# Altium PCB Alsoran PCB-20180114-version2.PcbDoc (part 3 of 4)
Units mil, origin at the board's own origin, x right, y up, seen from the top; angles counter-clockwise.
Board outline 15223.67 x 4104.31 mil, 2 copper layers (Top Layer, Bottom Layer); 293 components, 222 nets, 1561 pads, 240 vias.
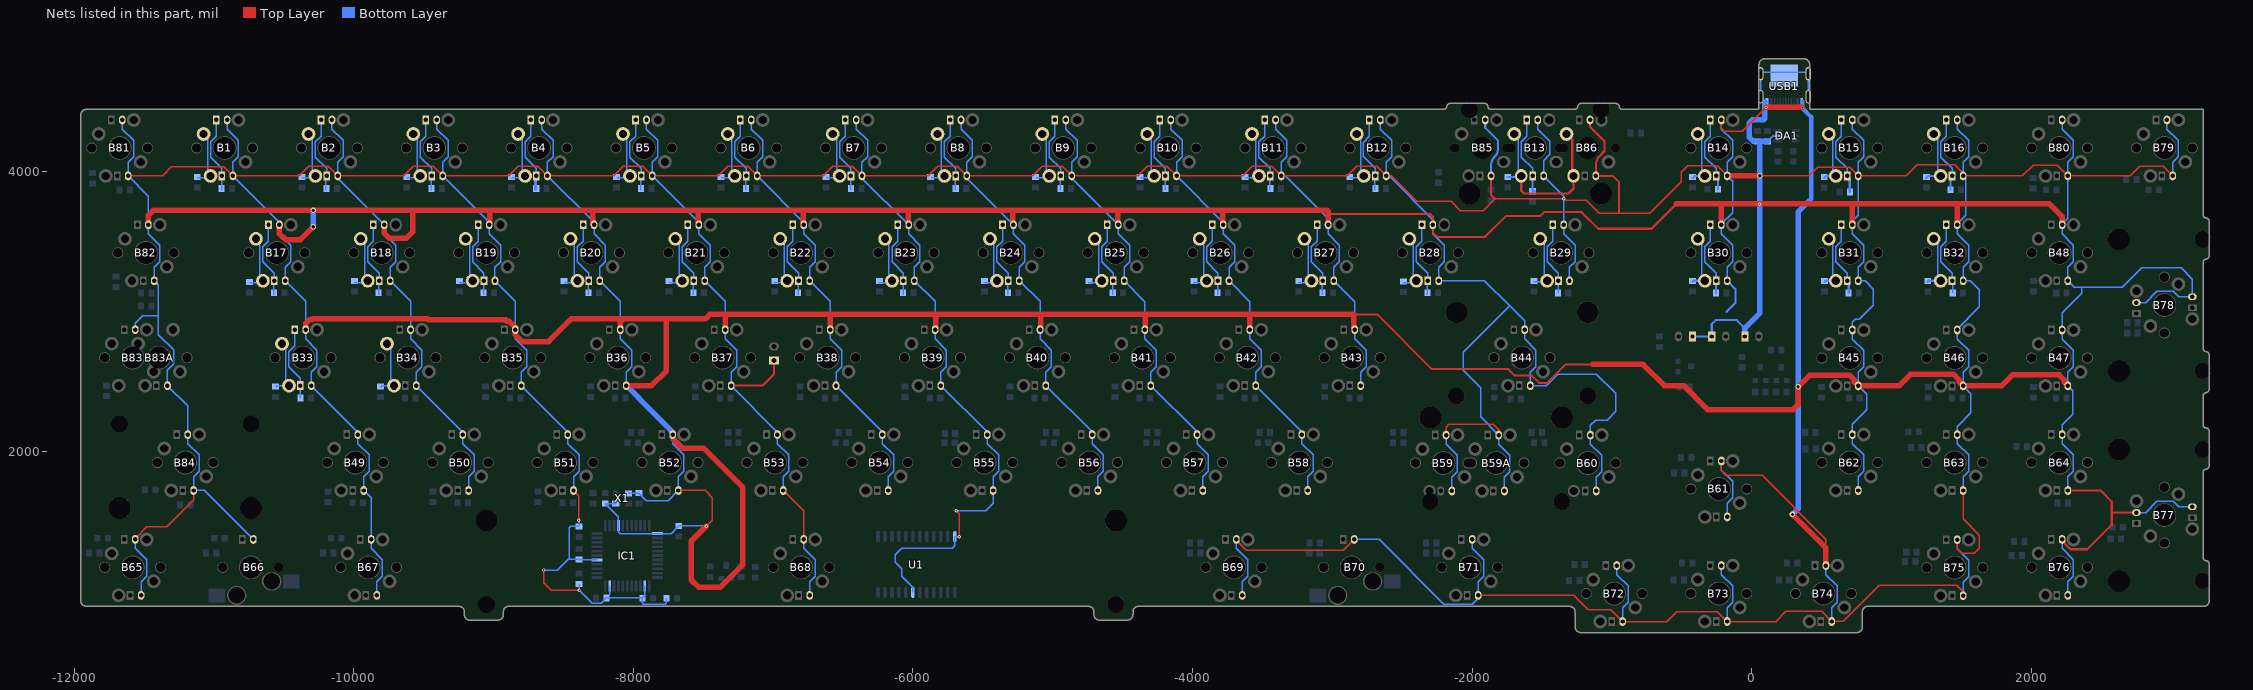
[diagram p3: the nets of this part, all layers, seen from the top]

## Via types
v1: diameter 23.62, hole 11.81, Top Layer to Bottom Layer, 150 vias
v2: diameter 27.56, hole 19.68, Top Layer to Bottom Layer, 63 vias
v3: diameter 39.37, hole 23.62, Top Layer to Bottom Layer, 12 vias
v4: diameter 24.41, hole 11.81, Top Layer to Bottom Layer, tented both sides, 10 vias
v5: diameter 23.62, hole 11.81, Top Layer to Bottom Layer, tented both sides, 3 vias
v6: diameter 31.5, hole 19.68, Top Layer to Bottom Layer, 2 vias

## Nets (pads, with @x,y where several pads share a name; then routed paths per layer and width w, separated by ;. In a path a pad name is that pad's centre, name@x,y a point inside that pad or via, vN(x,y) a via of type N, cw(c..) or ccw(c..) an arc to the next point about the centre after c; other vN are vias at no path point) (continued)
LROW: B1.4 B2.4 B3.4 B4.4 B5.4 B6.4 B7.4 B8.4 B9.4 B10.4 B11.4 B12.4 B13.4 B14.4 B15.4 B16.4 B17.4 B18.4 B19.4 B20.4 B21.4 B22.4 B23.4 B24.4 B25.4 B26.4 B27.4 B28.4 B29.4 B30.4 B31.4 B32.4 B33.4 B34.4 B35.4 B36.4 B37.4 B38.4 B39.4 B40.4 B41.4 B42.4 B43.4 B44.4 B45.4 B46.4 B47.4 B48.4 B49.4 B50.4 B51.4 B52.4 B53.4 B54.4 B55.4 B56.4 B57.4 B58.4 B59.4 B59A.4 B60.4 B61.4 B62.4 B63.4 B64.4 B65.4 B66.4 B67.4 B68.4 B69.4 B70.4 B71.4 B72.4 B73.4 B74.4 B75.4 B76.4 B77.4 B78.4 B79.4 B80.4 B81.4 B82.4 B83.4 B83A.4 B84.4 B85.4 B86.4 C1.1 C2.1 C3.1 C4.1 C5.1 C6.1 C7.1 C8.1 CapsLED1.2 DA1.2 IC1.5 IC1.15 IC1.23 IC1.35 IC1.43 NumLED1.2 pad.4@232.28,4688.98 R95.1 RA1.1 RA2.1 S1.1 ScorllLED1.2 U1.12 U1.19 USB1.0 USB1.A1 USB1.A12 USB1.B1 USB1.B12 X1.2 X1.4 | length 138991.8
  Top Layer w10: B81.4@-11613.23,3969.29 -11367.32,3969.29 -11303.15,4033.46 -10927.57,4033.46 B1.4@-10863.39,3969.29 -10390.94,3969.29 -10322.74,4037.5 -10181.77,4037.5 B2.4@-10113.56,3969.29 -9641.11,3969.29 -9572.9,4037.5 -9431.93,4037.5 B3.4@-9363.72,3969.29 -8891.27,3969.29 -8823.06,4037.5 -8682.09,4037.5 B4.4@-8613.89,3969.29 -8141.44,3969.29 -8073.23,4037.5 -7932.26,4037.5 B5.4@-7864.05,3969.29 -7391.6,3969.29 -7323.39,4037.5 -7182.42,4037.5 B6.4@-7114.21,3969.29 -6641.77,3969.29 -6573.56,4037.5 -6432.59,4037.5 B7.4@-6364.38,3969.29 -5891.93,3969.29 -5823.72,4037.5 -5682.75,4037.5 B8.4@-5614.54,3969.29 -5142.09,3969.29 -5073.88,4037.5 -4932.92,4037.5 B9.4@-4864.71,3969.29 -4392.26,3969.29 -4324.05,4037.5 -4183.08,4037.5 B10.4@-4114.87,3969.29 -3642.42,3969.29 -3574.21,4037.5 -3433.24,4037.5 B11.4@-3365.03,3969.29 -2892.59,3969.29 -2824.38,4037.5 -2683.41,4037.5 B12.4@-2615.2,3969.29 -2579.79,3969.29 -2397.5,3787 -2151.31,3787 -2084.15,3719.85 -1922.15,3719.85 -1837,3805 v4(-1345.82,3805) -1334.69,3793.87 -1183.67,3793.87 -1092.47,3702.67 -728.48,3702.67 -504.8,3926.35 -504.8,3995.24 -458.7,4041.34 -248.27,4041.34 B14.4@-176.22,3969.29 ; B65.4@-11562.36,1369.29 -11562.36,1375.43 -11479.12,1458.66 -11338.27,1458.66 -11144.72,1652.21 B84.4@-11144.72,1719.29 ; v1(-8640.2,1150.1) -8640.2,1058.8 -8587.8,1006.4 v1(-8387.8,1006.4) ; B51.4@-8427.75,1719.29 -8389.76,1681.3 v1(-8389.76,1505.91) ; B36.4@-8092.67,2869.29 B36.4@-8092.67,2875.43 ; B52.4@-7677.53,1719.29 -7487.01,1719.29 -7435.04,1667.32 -7435.04,1507.87 v1(-7478.35,1464.57) ; B53.4@-6927.31,1719.29 -6780.86,1572.84 B68.4@-6780.86,1369.29 ; v1(-5690.94,1574.8) -5668.31,1552.17 v1(-5668.31,1388.78) ; B69.4@-3686.37,1369.29 -3686.37,1363.15 -3614.56,1291.34 -2921.22,1291.34 B70.4@-2843.27,1369.29 ; B59.4@-2187.06,2115.8 -2187.06,2171.21 -2166.88,2191.39 -1848.87,2191.39 -1810.97,2153.49 B59A.4@-1810.97,2115.8 ; B71.4@-1957.72,969.29 -1274.41,969.29 -1171.26,866.14 -1008.11,866.14 B72.4@-924.25,782.28 -607.48,782.28 -537.4,852.36 -246.3,852.36 B73.4@-176.22,782.28 170.08,782.28 242.13,854.33 499.76,854.33 B74.4@571.81,782.28 574.96,785.43 655.51,785.43 911.42,1041.34 1464.57,1041.34 1510.79,995.12 B75.4@1510.79,967.32 ; B61.4@-217.87,1930.31 -217.87,1865.51 -179.13,1826.77 72.83,1826.77 530.16,1369.44 530.16,1308.42 ; B14.4@-217.87,4369.29 -217.87,4308.42 -198.82,4289.37 -66.93,4289.37 v1(102.36,4458.66) ; v3@55.51,3969.29 410.24,3969.29 472.44,4031.5 698.58,4031.5 B15.4@760.79,3969.29 1105.12,3969.29 1183.19,4047.36 1452.22,4047.36 1510.79,3988.8 B16.4@1510.79,3969.29 1933.86,3969.29 2011.81,4047.24 2182.83,4047.24 B80.4@2260.79,3969.29 2706.69,3969.29 2774.8,4037.4 2942.68,4037.4 B79.4@3010.79,3969.29 ; B75.4@1469.14,1367.32 1469.14,1302.51 1501.97,1269.69 1592.52,1269.69 1627.95,1305.12 1627.95,1399.61 1510.79,1516.77 B63.4@1510.79,1719.29
  Top Layer w14: -2848.56,2978.35 -2678.58,2978.35 -2288.33,2588.1 -1741.6,2588.1 -1694.1,2540.6 -1573.2,2540.6 -1521.7,2489.1 -1463.21,2489.1 -1330.41,2621.9 -1139.62,2621.9
  Top Layer w15: -3031.02,3715.04 -3013.68,3697.7 -2301.5,3697.7 -2281.04,3677.24 B28.4@-2281.04,3619.29 -2281.04,3563.54 -2250.5,3533 -1908.39,3533 -1757.77,3683.63 -1512.39,3683.63 -1485.89,3710.13 -1218.36,3710.13 -1099.31,3591.08 -717.92,3591.08 -539.13,3769.87 ; B85.4@-1865.36,3969.29 -1865.36,3833.36 -1837,3805 ; B86.4@-1157.17,4369.29 -1157.17,4321.26 -1053.5,4217.58 -1053.5,4147.5 -1086.24,4114.76 ccw(c-1015.53,4044.05) -1115.53,4044.05 B86.4@-1115.53,3969.29 -995.29,3969.29 -949,3923 -949,3708
  Top Layer w15.75: B37.4@-7300.63,2469.29 -7075.98,2469.29 -6994.09,2551.18 S1.1@-6994.09,2649.61 ; B76.4@2219.14,1369.29 2235.84,1352.59 2235.84,1342.39 2279.02,1299.21 2399.61,1299.21 2574.8,1474.41 2574.8,1561.66 ; B64.4@2260.79,1719.29 2495.28,1719.29 2574.8,1639.76 2574.8,1561.66 ; B77.4@2750.79,1561.66 2574.8,1561.66
  Top Layer w39.37: B82.4@-11467.87,3619.29 -11467.87,3687.64 -11433.07,3722.44 v3(-10289.37,3722.44) -9578.74,3722.44 ; B17.4@-10530.86,3619.29 -10530.86,3554.48 -10507.87,3531.5 ; -10502.74,3531.5 -10483.05,3511.81 -10382.87,3511.81 v3(-10289.37,3605.31) ; B33.4@-10343.85,2869.29 -10343.85,2914.02 -10318.9,2938.98 -10301.07,2938.98 -10294,2946.05 -10223.34,2946.05 -9543.61,2946.05 -9472.94,2946.05 -9465.87,2938.98 -8912.75,2938.98 -8902.12,2928.35 -8886.38,2928.35 -8843.06,2885.03 -8843.06,2832.68 -8794.84,2784.45 -8606.3,2784.45 -8444.7,2946.05 -7764.16,2946.05 ; B18.4@-9780.88,3619.29 -9780.88,3558.44 -9753.94,3531.5 ; -9743.89,3522.64 -9625,3522.64 -9578.74,3568.9 -9578.74,3722.44 ; B19.4@-9030.89,3619.29 -9028,3622.18 -9028,3722.44 ; B20.4@-8280.91,3619.29 -8288.79,3627.17 -8288.79,3722.44 ; B36.4@-8092.67,2875.43 -8092.67,2924.06 -8074.8,2941.93 ; B36.4@-8051.02,2469.29 -7870.28,2469.29 -7764.16,2575.41 -7764.16,2946.05 ; B52.4@-7719.18,2119.29 -7714.29,2114.4 -7714.29,2087.5 -7646.48,2019.69 -7494.99,2019.69 -7216.54,1741.23 -7216.54,1188.61 -7379.55,1025.59 -7530.51,1025.59 -7585.63,1080.71 -7585.63,1357.28 v1(-7478.35,1464.57) ; B21.4@-7535.8,3624.17 -7535.8,3722.44 ; B37.4@-7342.28,2869.29 -7342.28,2964.57 ; B22.4@-6785.76,3624.11 -6785.76,3722.44 ; B38.4@-6591.88,2869.29 -6591.88,2978.35 ; B23.4@-6032.77,3621.11 -6032.77,3722.44 ; B39.4@-5841.49,2869.29 -5836.6,2874.18 -5836.6,2976.68 -5834.93,2978.35 ; B24.4@-5286.68,3624.99 -5286.68,3722.44 ; B40.4@-5091.1,2869.29 -5086.21,2874.18 -5086.21,2975.06 -5082.93,2978.35 ; B25.4@-4535.65,3623.96 -4535.65,3722.44 ; B41.4@-4340.7,2869.29 -4339.78,2870.21 -4339.78,2978.35 ; B26.4@-3783.65,3621.93 -3783.65,3722.44 ; B42.4@-3590.31,2869.29 -3590.73,2869.71 -3590.73,2978.35 ; B27.4@-3031.02,3619.29 -3031.02,3715.04 -3038.43,3722.44 -3783.65,3722.44 ; B43.4@-2839.91,2869.29 -2848.56,2877.94 -2848.56,2978.35 -3590.73,2978.35 ; -1139.62,2621.9 -778.45,2621.9 -626.04,2469.49 -487.02,2469.49 -315.76,2298.23 -227.36,2298.23 295.8,2298.23 330.71,2333.14 v3(330.71,2460.75) 415.23,2545.28 697.99,2545.28 733.03,2510.24 733.03,2495.08 B45.4@760.79,2467.32 1053.94,2467.32 1137.8,2551.18 1442.09,2551.18 1483.03,2510.24 1483.03,2495.08 B46.4@1510.79,2467.32 1786.22,2467.32 1864.7,2545.8 2197.47,2545.8 2233.03,2510.24 2233.03,2495.08 B47.4@2260.79,2467.32 ; -539.13,3769.87 2127.77,3769.87 2219.14,3678.5 B48.4@2219.14,3619.29 ; B30.4@-217.87,3619.29 -217.87,3766.28 ; B14.4@-175.83,3969.68 v3(55.51,3969.68) ; v1(102.36,4458.66) v1@362.19,4458.66 ; v3(290.35,1548.23) 530.16,1308.42 B74.4@530.16,1182.28 ; B31.4@719.14,3619.29 719.14,3757.42 ; B32.4@1469.14,3619.29 1469.14,3761.65 ; -9578.74,3722.44 -9028,3722.44 ; -9028,3722.44 -8288.79,3722.44 ; -8288.79,3722.44 -7535.8,3722.44 ; -7764.16,2946.05 -7485.05,2946.05 -7452.76,2978.35 -6591.88,2978.35 ; -7535.8,3722.44 -6785.76,3722.44 ; -6785.76,3722.44 -6032.77,3722.44 ; -6591.88,2978.35 -5834.93,2978.35 ; -6032.77,3722.44 -5286.68,3722.44 ; -5834.93,2978.35 -5082.93,2978.35 ; -5286.68,3722.44 -4535.65,3722.44 ; -5082.93,2978.35 -4339.78,2978.35 ; -4535.65,3722.44 -3783.65,3722.44 ; -4339.78,2978.35 -3590.73,2978.35
  Bottom Layer w10: B81.4@-11654.88,4369.29 -11654.88,4304.48 -11573.68,4223.29 -11573.68,4106.62 -11613.23,4067.08 B81.4@-11613.23,3969.29 -11467.87,3823.93 B82.4@-11467.87,3619.29 -11467.87,3554.48 -11386.68,3473.29 -11386.68,3355.45 -11426.22,3315.91 B82.4@-11426.22,3219.29 -11397.64,3190.71 -11397.64,2964.57 ; B65.4@-11562.36,1369.29 -11562.36,1304.48 -11481.16,1223.29 -11481.16,1105.45 -11520.71,1065.91 B65.4@-11520.71,969.29 ; B83.4@-11562.36,2869.29 -11562.36,2915.99 -11507.87,2970.47 -11403.54,2970.47 -11397.64,2964.57 ; B1.4@-10905.04,4369.29 -10905.04,4304.48 -10823.85,4223.29 -10823.85,4105.45 -10863.39,4065.91 B1.4@-10863.39,3969.29 -10530.86,3636.76 B17.4@-10530.86,3619.29 -10530.86,3554.48 -10449.67,3473.29 -10449.67,3355.45 -10489.21,3315.91 B17.4@-10489.21,3219.29 -10343.85,3073.93 B33.4@-10343.85,2869.29 -10343.85,2804.48 -10262.66,2723.29 -10262.66,2605.45 -10302.2,2565.91 B33.4@-10302.2,2469.29 -9969.84,2136.92 B49.4@-9969.84,2119.29 -9969.84,2054.48 -9888.64,1973.29 -9888.64,1856.62 -9928.19,1817.08 B49.4@-9928.19,1719.29 -9875.35,1666.45 B67.4@-9875.35,1369.29 -9875.35,1304.48 -9794.16,1223.29 -9794.16,1106.62 -9833.7,1067.08 B67.4@-9833.7,969.29 ; B66.4@-10717.28,1369.29 -11067.28,1719.29 B84.4@-11144.72,1719.29 -11144.72,1815.91 -11105.18,1855.45 -11105.18,1973.29 -11186.37,2054.48 B84.4@-11186.37,2119.29 -11186.37,2323.93 B83A.4@-11331.73,2469.29 -11331.73,2579.68 -11287.4,2624.02 -11287.4,2724.41 -11397.64,2834.65 -11397.64,2964.57 ; B2.4@-10155.2,4369.29 -10155.2,4304.48 -10074.01,4223.29 -10074.01,4105.45 -10113.56,4065.91 B2.4@-10113.56,3969.29 -10113.56,3951.97 B18.4@-9780.88,3619.29 -9780.88,3554.48 -9699.68,3473.29 -9699.68,3355.45 -9739.23,3315.91 B18.4@-9739.23,3219.29 -9593.46,3073.52 B34.4@-9593.46,2869.29 -9593.46,2804.48 -9512.27,2723.29 -9512.27,2605.45 -9551.81,2565.91 B34.4@-9551.81,2469.29 -9219.62,2137.1 B50.4@-9219.62,2119.29 -9219.62,2054.48 -9138.43,1973.29 -9138.43,1856.62 -9177.97,1817.08 B50.4@-9177.97,1719.29 ; B3.4@-9405.37,4369.29 -9405.37,4304.48 -9324.18,4223.29 -9324.18,4105.45 -9363.72,4065.91 B3.4@-9363.72,3969.29 -9030.89,3636.46 B19.4@-9030.89,3619.29 -9030.89,3554.48 -8949.7,3473.29 -8949.7,3356.62 -8989.25,3317.08 B19.4@-8989.25,3219.29 -8843.06,3073.11 B35.4@-8843.06,2869.29 -8843.06,2804.48 -8761.87,2723.29 -8761.87,2605.45 -8801.42,2565.91 B35.4@-8801.42,2469.29 -8469.4,2137.27 B51.4@-8469.4,2119.29 -8469.4,2054.48 -8388.21,1973.29 -8388.21,1856.62 -8427.75,1817.08 B51.4@-8427.75,1719.29 ; B4.4@-8655.53,4369.29 -8655.53,4304.48 -8574.34,4223.29 -8574.34,4105.45 -8613.89,4065.91 B4.4@-8613.89,3969.29 -8280.91,3636.31 B20.4@-8280.91,3619.29 -8280.91,3554.48 -8199.72,3473.29 -8199.72,3356.62 -8239.26,3317.08 B20.4@-8239.26,3219.29 -8092.67,3072.7 B36.4@-8092.67,2869.29 -8092.67,2804.48 -8011.48,2723.29 -8011.48,2605.45 -8051.02,2565.91 B36.4@-8051.02,2469.29 ; v1(-8640.2,1150.1) -8542.9,1150.1 -8466.23,1226.77 -8456.4,1226.77 ; v1(-8389.76,1505.91) -8387.8,1503.94 C8.1@-8387.8,1462.6 -8446.85,1462.6 -8456.4,1453.05 -8456.4,1226.77 ; C2.1@-8387.8,1049.21 v1(-8387.8,1006.4) -8294.7,913.31 -8230.39,913.31 C4.1@-8192.91,950.79 -7937.01,950.79 -7937.01,916.11 -7928.2,907.3 -7769.8,907.3 -7763.78,913.32 R95.1@-7763.78,948.82 ; IC1.5@-8259.84,1222.44 -8383.46,1222.44 C1.1@-8387.8,1226.77 -8456.4,1226.77 ; -8169.29,974.41 IC1.43@-8169.29,1037.4 ; X1.4@-8125.98,1627.59 -8127.56,1626.01 C6.1@-8200.79,1626.01 -8106.3,1531.52 IC1.15@-8106.3,1470.47 -8106.3,1425.2 -8092.52,1411.42 IC1.23@-7826.77,1411.42 -7730.31,1411.42 C3.1@-7675.2,1466.54 -7480.32,1466.54 v1(-7478.35,1464.57) ; X1.2@-8035.43,1698.45 -7962.2,1698.45 C7.1@-7960.63,1700.03 -7907.49,1646.89 -7749.94,1646.89 B52.4@-7677.53,1719.29 -7677.53,1817.08 -7637.99,1856.62 -7637.99,1973.29 -7719.18,2054.48 B52.4@-7719.18,2119.29 ; C5.1@-7935.04,948.82 -7917.32,966.54 IC1.35@-7917.32,1037.4 ; B5.4@-7905.7,4369.29 -7905.7,4304.48 -7824.5,4223.29 -7824.5,4105.45 -7864.05,4065.91 B5.4@-7864.05,3969.29 -7530.93,3636.17 B21.4@-7530.93,3619.29 -7530.93,3554.48 -7449.73,3473.29 -7449.73,3356.62 -7489.28,3317.08 B21.4@-7489.28,3219.29 -7342.28,3072.29 B37.4@-7342.28,2869.29 -7342.28,2804.48 -7261.08,2723.29 -7261.08,2605.45 -7300.63,2565.91 B37.4@-7300.63,2469.29 -6968.96,2137.62 B53.4@-6968.96,2119.29 -6968.96,2054.48 -6887.77,1973.29 -6887.77,1856.62 -6927.31,1817.08 B53.4@-6927.31,1719.29 ; B6.4@-7155.86,4369.29 -7155.86,4304.48 -7074.67,4223.29 -7074.67,4105.45 -7114.21,4065.91 B6.4@-7114.21,3969.29 -6780.94,3636.02 B22.4@-6780.94,3619.29 -6780.94,3554.48 -6699.75,3473.29 -6699.75,3356.62 -6739.29,3317.08 B22.4@-6739.29,3219.29 -6591.88,3071.88 B38.4@-6591.88,2869.29 -6591.88,2804.48 -6510.69,2723.29 -6510.69,2605.45 -6550.24,2565.91 B38.4@-6550.24,2469.29 -6218.74,2137.8 B54.4@-6218.74,2119.29 -6218.74,2054.48 -6137.55,1973.29 -6137.55,1856.62 -6177.1,1817.08 B54.4@-6177.1,1719.29 ; B68.4@-6780.86,1369.29 -6780.86,1304.48 -6699.67,1223.29 -6699.67,1105.45 -6739.21,1065.91 B68.4@-6739.21,969.29 ; B7.4@-6406.02,4369.29 -6406.02,4304.48 -6324.83,4223.29 -6324.83,4105.45 -6364.38,4065.91 B7.4@-6364.38,3969.29 -6364.38,3952.71 B23.4@-6030.96,3619.29 -6030.96,3554.48 -5949.77,3473.29 -5949.77,3355.45 -5989.31,3315.91 B23.4@-5989.31,3219.29 -5841.49,3071.47 B39.4@-5841.49,2869.29 -5841.49,2804.48 -5760.3,2723.29 -5760.3,2605.45 -5799.84,2565.91 B39.4@-5799.84,2469.29 -5468.52,2137.97 B55.4@-5468.52,2119.29 -5468.52,2054.48 -5387.33,1973.29 -5387.33,1856.62 -5426.88,1817.08 B55.4@-5426.88,1719.29 -5426.88,1626.27 -5478.35,1574.8 v1(-5690.94,1574.8) ; U1.19@-6000,989.76 -6000,1025.59 -6081.69,1107.28 -6081.69,1159.45 -6127.95,1205.71 -6127.95,1258.86 -6081.69,1305.12 -5719.09,1305.12 -5700,1324.21 U1.12@-5700,1389.76 -5668.31,1389.76 v1(-5668.31,1388.78) ; B8.4@-5656.19,4369.29 -5656.19,4304.48 -5575,4223.29 -5575,4105.45 -5614.54,4065.91 B8.4@-5614.54,3969.29 -5614.54,3952.86 B24.4@-5280.97,3619.29 -5280.97,3554.48 -5199.78,3473.29 -5199.78,3356.62 -5239.33,3317.08 B24.4@-5239.33,3219.29 -5091.1,3071.06 B40.4@-5091.1,2869.29 -5091.1,2804.48 -5009.9,2723.29 -5009.9,2605.45 -5049.45,2565.91 B40.4@-5049.45,2469.29 -4718.31,2138.15 B56.4@-4718.31,2119.29 -4718.31,2054.48 -4637.11,1973.29 -4637.11,1856.62 -4676.66,1817.08 B56.4@-4676.66,1719.29 ; B9.4@-4906.35,4369.29 -4906.35,4304.48 -4825.16,4223.29 -4825.16,4105.45 -4864.71,4065.91 B9.4@-4864.71,3969.29 -4864.71,3953.01 B25.4@-4530.99,3619.29 -4530.99,3554.48 -4449.8,3473.29 -4449.8,3356.62 -4489.34,3317.08 B25.4@-4489.34,3219.29 -4340.7,3070.65 B41.4@-4340.7,2869.29 -4340.7,2804.48 -4259.51,2723.29 -4259.51,2605.45 -4299.06,2565.91 B41.4@-4299.06,2469.29 -3968.09,2138.32 B57.4@-3968.09,2119.29 -3968.09,2054.48 -3886.9,1973.29 -3886.9,1856.62 -3926.44,1817.08 B57.4@-3926.44,1719.29 ; B10.4@-4156.52,4369.29 -4156.52,4304.48 -4075.33,4223.29 -4075.33,4105.45 -4114.87,4065.91 B10.4@-4114.87,3969.29 -3781.01,3635.43 B26.4@-3781.01,3619.29 -3781.01,3554.48 -3699.82,3473.29 -3699.82,3355.45 -3739.36,3315.91 B26.4@-3739.36,3219.29 -3590.31,3070.24 B42.4@-3590.31,2869.29 -3590.31,2804.48 -3509.12,2723.29 -3509.12,2605.45 -3548.66,2565.91 B42.4@-3548.66,2469.29 -3217.87,2138.5 B58.4@-3217.87,2119.29 -3217.87,2054.48 -3136.68,1973.29 -3136.68,1856.62 -3176.22,1817.08 B58.4@-3176.22,1719.29 ; B69.4@-3686.37,1369.29 -3686.37,1304.48 -3605.18,1223.29 -3605.18,1105.45 -3644.72,1065.91 B69.4@-3644.72,969.29 ; B11.4@-3406.68,4369.29 -3406.68,4304.48 -3325.49,4223.29 -3325.49,4105.45 -3365.03,4065.91 B11.4@-3365.03,3969.29 -3337.4,3969.29 -3031.02,3662.91 B27.4@-3031.02,3619.29 -3031.02,3554.48 -2949.83,3473.29 -2949.83,3356.62 -2989.38,3317.08 B27.4@-2989.38,3219.29 -2839.91,3069.83 B43.4@-2839.91,2869.29 -2839.91,2804.48 -2758.72,2723.29 -2758.72,2605.45 -2798.27,2565.91 B43.4@-2798.27,2469.29 ; B70.4@-2843.27,1369.29 -2666.54,1369.29 -2203.82,906.57 -1998.94,906.57 -1957.72,947.8 B71.4@-1957.72,969.29 -1957.72,1065.91 -1918.17,1105.45 -1918.17,1223.29 -1999.36,1304.48 B71.4@-1999.36,1369.29 ; B12.4@-2656.85,4369.29 -2656.85,4304.48 -2575.65,4223.29 -2575.65,4105.45 -2615.2,4065.91 B12.4@-2615.2,3969.29 -2593.31,3969.29 -2281.04,3657.02 B28.4@-2281.04,3619.29 -2281.04,3554.48 -2199.85,3473.29 -2199.85,3355.45 -2239.39,3315.91 B28.4@-2239.39,3219.29 -1912.2,3219.29 -1732.26,3039.34 ; B59.4@-2187.06,2115.8 -2187.06,2050.99 -2105.87,1969.79 -2105.87,1853.13 -2145.41,1813.58 B59.4@-2145.41,1715.8 ; B59A.4@-1769.32,1715.8 -1769.32,1813.58 -1729.77,1853.13 -1729.77,1969.79 -1810.97,2050.99 B59A.4@-1810.97,2115.8 -1940.19,2245.01 -1940.19,2455.82 -2064.96,2580.6 -2064.96,2706.64 -1732.26,3039.34 ; B13.4@-1530.86,4369.29 -1530.86,4304.48 -1445,4218.62 -1445,4123 -1489.21,4078.79 B13.4@-1489.21,3969.29 -1489.21,3967.74 -1345.82,3824.34 v4(-1345.82,3805) B29.4@-1345.82,3619.29 -1345.82,3554.48 -1264.63,3473.29 -1264.63,3356.62 -1304.17,3317.08 B29.4@-1304.17,3219.29 ; B60.4@-1113.23,1715.8 -1113.23,1813.58 -1073.68,1853.13 -1073.68,1969.79 -1154.88,2050.99 B60.4@-1154.88,2115.8 -1154.88,2184.52 -1116.5,2222.9 -1035.2,2222.9 -973.17,2284.93 -973.17,2413.2 -1111.4,2551.42 -1387.98,2551.42 -1470.11,2469.29 B44.4@-1583.7,2469.29 -1583.7,2565.91 -1544.16,2605.45 -1544.16,2723.29 -1625.35,2804.48 B44.4@-1625.35,2869.29 -1625.35,2932.43 -1732.26,3039.34 ; B72.4@-965.9,1182.28 -965.9,1117.47 -884.71,1036.28 -884.71,918.44 -924.25,878.9 B72.4@-924.25,782.28 ; B73.4@-217.87,1182.28 -217.87,1117.47 -136.68,1036.28 -136.68,918.44 -176.22,878.9 B73.4@-176.22,782.28 ; B61.4@-217.87,1930.31 -217.87,1865.51 -136.68,1784.31 -136.68,1667.65 -176.22,1628.1 B61.4@-176.22,1530.31 ; B14.4@-217.87,4369.29 -217.87,4304.48 -136.68,4223.29 -136.68,4106.62 -176.22,4067.08 B14.4@-176.22,3969.29 -137.8,3930.87 -137.8,3705.5 -217.87,3625.43 B30.4@-217.87,3619.29 -217.87,3554.48 -136.68,3473.29 -136.68,3355.45 -176.22,3315.91 B30.4@-176.22,3219.29 ; USB1.0@62.39,4508.4 89.12,4508.4 ; USB1.0@62.39,4543.83 USB1.0@62.39,4547.77 USB1.0@62.39,4551.7 USB1.0@62.39,4555.64 USB1.0@62.39,4559.58 USB1.0@62.39,4563.51 USB1.0@62.39,4676.9 USB1.0@62.39,4680.84 USB1.0@62.39,4684.77 USB1.0@62.39,4688.71 USB1.0@62.39,4692.65 USB1.0@62.39,4696.58 USB1.0@62.39,4700.52 USB1.0@62.39,4704.46 USB1.0@62.39,4708.4 ; USB1.0@62.39,4712.33 USB1.0@62.39,4708.4 ; USB1.0@71.4,4526.11 89.12,4508.4 ; USB1.A1@101.47,4499.68 97.83,4499.68 89.12,4508.4 ; USB1.A1@101.92,4500.13 USB1.A1@102.36,4499.68 ; USB1.B12@112.58,4500.13 104.31,4508.4 89.12,4508.4 ; RA2.1@113.19,4216.93 152.16,4255.91 DA1.2@186.02,4255.91 ; USB1.0@402.94,4551.7 USB1.0@402.94,4555.64 USB1.0@402.94,4559.58 USB1.0@402.94,4563.51 USB1.0@402.94,4676.9 USB1.0@402.94,4680.84 USB1.0@402.94,4684.77 USB1.0@402.94,4688.71 USB1.0@402.94,4692.65 USB1.0@402.94,4696.58 USB1.0@402.94,4700.52 USB1.0@402.94,4704.46 USB1.0@402.94,4708.4 ; USB1.0@402.94,4724.14 391.13,4712.33 66.32,4712.33 USB1.0@62.39,4708.4 ; B74.4@530.16,1182.28 530.16,1117.47 611.36,1036.28 611.36,918.44 571.81,878.9 B74.4@571.81,782.28 ; B15.4@719.14,4369.29 719.14,4304.48 800.33,4223.29 800.33,4106.62 760.79,4067.08 B15.4@760.79,3969.29 760.79,3689.15 ; B31.4@738.71,3638.86 B31.4@719.14,3619.29 ; 738.71,3667.08 760.79,3689.15 ; B62.4@760.79,1719.29 760.79,1817.08 800.33,1856.62 800.33,1973.29 719.14,2054.48 B62.4@719.14,2119.29 719.14,2193.55 820.87,2295.28 820.87,2407.24 B45.4@760.79,2467.32 760.79,2563.94 800.33,2603.48 800.33,2721.32 719.14,2802.51 B45.4@719.14,2867.32 719.14,2921.9 740.16,2942.91 767.72,2942.91 870.08,3045.28 870.08,3159.45 810.24,3219.29 B31.4@760.79,3219.29 760.79,3315.91 800.33,3355.45 800.33,3473.29 719.14,3554.48 B31.4@719.14,3619.29 ; B75.4@1469.14,1367.32 1469.14,1302.51 1550.33,1221.32 1550.33,1103.48 1510.79,1063.94 B75.4@1510.79,967.32 ; B16.4@1469.14,4369.29 1469.14,4304.48 1550.33,4223.29 1550.33,4106.62 1510.79,4067.08 B16.4@1510.79,3969.29 1530.59,3949.49 1530.59,3686.88 1469.14,3625.43 B32.4@1469.14,3619.29 1469.14,3554.48 1550.33,3473.29 1550.33,3355.45 1510.79,3315.91 B32.4@1510.79,3219.29 1562.2,3219.29 1627.95,3153.54 1627.95,3032.27 1469.14,2873.46 B46.4@1469.14,2867.32 1469.14,2802.51 1550.33,2721.32 1550.33,2603.48 1510.79,2563.94 B46.4@1510.79,2467.32 1566.93,2411.18 1566.93,2273.62 1469.14,2175.83 B63.4@1469.14,2119.29 1469.14,2054.48 1550.33,1973.29 1550.33,1856.62 1510.79,1817.08 B63.4@1510.79,1719.29 ; B76.4@2219.14,1369.29 2219.14,1304.48 2300.33,1223.29 2300.33,1105.45 2260.79,1065.91 B76.4@2260.79,969.29 ; B80.4@2219.14,4369.29 2219.14,4304.48 2300.33,4223.29 2300.33,4106.62 2260.79,4067.08 B80.4@2260.79,3969.29 2260.79,3667.08 2219.14,3625.43 B48.4@2219.14,3619.29 2219.14,3554.48 2300.33,3473.29 2300.33,3356.62 2260.79,3317.08 B48.4@2260.79,3219.29 2306.85,3173.23 2360.24,3173.23 ; B64.4@2260.79,1719.29 2260.79,1817.08 2300.33,1856.62 2300.33,1973.29 2219.14,2054.48 B64.4@2219.14,2119.29 2219.14,2189.61 2295.28,2265.75 2295.28,2432.83 B47.4@2260.79,2467.32 2260.79,2565.11 2300.33,2604.65 2300.33,2721.32 2219.14,2802.51 B47.4@2219.14,2867.32 2219.14,2988.83 2360.24,3129.92 2360.24,3173.23 ; B77.4@2750.79,1561.66 2815.6,1561.66 2896.79,1642.85 3014.63,1642.85 3054.17,1603.31 B77.4@3150.79,1603.31 ; B78.4@2750.79,3063.63 2815.6,3063.63 2896.79,3144.82 3014.63,3144.82 3054.17,3105.28 B78.4@3150.79,3105.28 3150.79,3231.1 3070.87,3311.02 2787.4,3311.02 2649.61,3173.23 2360.24,3173.23 ; B79.4@2969.14,4369.29 2969.14,4304.48 3050.33,4223.29 3050.33,4105.45 3010.79,4065.91 B79.4@3010.79,3969.29 ; B31.4@719.14,3619.29 719.14,3647.5 760.79,3689.15
  Bottom Layer w15: B85.4@-1907.01,4369.29 -1907.01,4314.01 -1816,4223 -1816,4162.53 cw(c-1894.53,4162.53) -1839,4107 ccw(c-1775.35,4043.35) -1865.36,4043.35 B85.4@-1865.36,3969.29 ; NumLED1.2@-424.13,2820.87 CapsLED1.2@-286.92,2820.87 -286.92,2909.68 -259.2,2937.4 -106.94,2937.4 -49.72,2880.18
  Bottom Layer w15.75: -181.69,2997.44 -116.14,3062.99 -116.14,3159.21 B30.4@-176.22,3219.29
  Bottom Layer w31.5: v1@362.58,4452.38 423.62,4391.34 ; v1@362.58,4458.88 USB1.A12@362.58,4500.13 ; 425.2,3804.32 425.2,4389.76
  Bottom Layer w39.37: v3(-10289.37,3605.31) v3(-10289.37,3722.44) ; B36.4@-8051.02,2469.29 -8047.44,2469.29 -7961.42,2383.26 -7961.42,2379.68 -7719.18,2137.45 B52.4@-7719.18,2119.29 ; ScorllLED1.2@-49.72,2820.87 -49.72,2880.18 55.51,2985.41 v1(55.51,3766.73) v3(55.51,3969.68) RA1.1@55.51,4202.76 ; -19.69,4244.09 -19.69,4347.44 2.94,4370.07 84.21,4370.07 93.88,4379.74 93.88,4496.19 ; -8.5,4236.22 10.79,4216.93 ; RA1.1@41.34,4216.93 RA2.1@113.19,4216.93 ; v3(290.35,1548.23) 330.71,1588.58 v3(330.71,2460.75) 330.71,3709.83 413.89,3793.01
  other v1: 362.22,4458.88
NetB1_2: B1.2 D1.1 | length 444.3
  Bottom Layer w10: D1.1@-11096.61,3954.72 -11118.77,3954.72 -11037.96,3954.72 B1.2@-11023.39,3969.29 -11045.44,3991.34 -11045.44,4241.34 B1.2@-11073.39,4269.29
NetB1_3: B1.3 R8.2 | length 552.7
  Bottom Layer w10: B1.3@-10983.39,4369.29 -10983.39,4252.99 -11023.79,4212.6 -11023.79,4104.33 -10942.33,4022.87 B1.3@-10942.33,3969.29 -10944.88,3966.74 R8.2@-10944.88,3868.11
NetB2_2: B2.2 D2.1 | length 422.6
  Bottom Layer w10: D2.1@-10369.42,3954.72 -10288.12,3954.72 B2.2@-10273.56,3969.29 -10295.6,3991.34 -10295.6,4241.34 B2.2@-10323.56,4269.29
NetB2_3: B2.3 R22.2 | length 554
  Bottom Layer w10: B2.3@-10233.56,4369.29 -10233.56,4252.99 -10273.95,4212.6 -10273.95,4104.33 -10192.49,4022.87 B2.3@-10192.49,3969.29 -10198.1,3963.68 R22.2@-10198.1,3868.11
NetB3_2: B3.2 D3.1 | length 444.3
  Bottom Layer w10: D3.1@-9596.94,3954.72 -9619.09,3954.72 -9538.29,3954.72 B3.2@-9523.72,3969.29 -9545.77,3991.34 -9545.77,4241.34 B3.2@-9573.72,4269.29
NetB3_3: B3.3 R9.2 | length 552.7
  Bottom Layer w10: B3.3@-9483.72,4369.29 -9483.72,4252.99 -9524.11,4212.6 -9524.11,4104.33 -9442.66,4022.87 B3.3@-9442.66,3969.29 -9445.21,3966.74 R9.2@-9445.21,3868.11
NetB4_2: B4.2 D4.1 | length 475.5
  Bottom Layer w10: D4.1@-8847.1,3954.72 -8869.26,3954.72 -8788.45,3954.72 B4.2@-8773.89,3969.29 ; B4.2@-8823.89,4269.29 -8795.93,4241.34 B4.2@-8795.93,3991.34 ; B4.2@-8795.93,3991.34 B4.2@-8773.89,3969.29 ; B4.2@-8795.93,3991.34 B4.2@-8773.89,3969.29
NetB4_3: B4.3 R10.2 | length 658.7
  Bottom Layer w10: B4.3@-8733.89,4369.29 -8733.89,4252.99 -8774.28,4212.6 -8774.28,4104.33 -8692.82,4022.87 B4.3@-8692.82,3969.29 ; R10.2@-8704.55,3868.11 -8704.55,3957.57 B4.3@-8692.82,3969.29 ; R10.2@-8695.37,3868.11 -8695.37,3966.74 B4.3@-8692.82,3969.29
NetB5_2: B5.2 D5.1 | length 475.5
  Bottom Layer w10: D5.1@-8097.27,3954.72 -8119.42,3954.72 -8038.62,3954.72 B5.2@-8024.05,3969.29 ; B5.2@-8074.05,4269.29 -8046.1,4241.34 B5.2@-8046.1,3991.34 ; B5.2@-8046.1,3991.34 B5.2@-8024.05,3969.29 ; B5.2@-8046.1,3991.34 B5.2@-8024.05,3969.29
NetB5_3: B5.3 R11.2 | length 552.7
  Bottom Layer w10: B5.3@-7984.05,4369.29 -7984.05,4252.99 -8024.44,4212.6 -8024.44,4104.33 -7942.99,4022.87 B5.3@-7942.99,3969.29 -7945.54,3966.74 R11.2@-7945.54,3868.11
NetB6_2: B6.2 D6.1 | length 475.5
  Bottom Layer w10: -7347.43,3954.72 -7369.59,3954.72 -7288.78,3954.72 B6.2@-7274.21,3969.29 ; B6.2@-7324.21,4269.29 -7296.26,4241.34 B6.2@-7296.26,3991.34 ; B6.2@-7296.26,3991.34 B6.2@-7274.21,3969.29 ; B6.2@-7296.26,3991.34 B6.2@-7274.21,3969.29
NetB6_3: B6.3 R12.2 | length 552.7
  Bottom Layer w10: B6.3@-7234.21,4369.29 -7234.21,4252.99 -7274.61,4212.6 -7274.61,4104.33 -7193.15,4022.87 B6.3@-7193.15,3969.29 -7195.7,3966.74 R12.2@-7195.7,3868.11
NetB7_2: B7.2 D7.1 | length 475.5
  Bottom Layer w10: -6597.6,3954.72 -6619.75,3954.72 -6538.94,3954.72 B7.2@-6524.38,3969.29 ; B7.2@-6574.38,4269.29 -6546.42,4241.34 B7.2@-6546.42,3991.34 ; B7.2@-6546.42,3991.34 B7.2@-6524.38,3969.29 ; B7.2@-6546.42,3991.34 B7.2@-6524.38,3969.29
NetB7_3: B7.3 R13.2 | length 552.7
  Bottom Layer w10: B7.3@-6484.38,4369.29 -6484.38,4252.99 -6524.77,4212.6 -6524.77,4104.33 -6443.31,4022.87 B7.3@-6443.31,3969.29 -6445.87,3966.74 R13.2@-6445.87,3868.11
NetB8_2: B8.2 D8.1 | length 475.5
  Bottom Layer w10: -5847.76,3954.72 -5869.92,3954.72 -5789.11,3954.72 B8.2@-5774.54,3969.29 ; B8.2@-5824.54,4269.29 -5796.59,4241.34 B8.2@-5796.59,3991.34 ; B8.2@-5796.59,3991.34 B8.2@-5774.54,3969.29 ; B8.2@-5796.59,3991.34 B8.2@-5774.54,3969.29
NetB8_3: B8.3 R14.2 | length 552.7
  Bottom Layer w10: B8.3@-5734.54,4369.29 -5734.54,4252.99 -5774.94,4212.6 -5774.94,4104.33 -5693.48,4022.87 B8.3@-5693.48,3969.29 -5696.03,3966.74 R14.2@-5696.03,3868.11
NetB9_2: B9.2 D9.1 | length 475.5
  Bottom Layer w10: -5097.93,3954.72 -5120.08,3954.72 -5039.27,3954.72 B9.2@-5024.71,3969.29 ; B9.2@-5074.71,4269.29 -5046.75,4241.34 B9.2@-5046.75,3991.34 ; B9.2@-5046.75,3991.34 B9.2@-5024.71,3969.29 ; B9.2@-5046.75,3991.34 B9.2@-5024.71,3969.29
NetB9_3: B9.3 R15.2 | length 552.7
  Bottom Layer w10: B9.3@-4984.71,4369.29 -4984.71,4252.99 -5025.1,4212.6 -5025.1,4104.33 -4943.64,4022.87 B9.3@-4943.64,3969.29 -4946.2,3966.74 R15.2@-4946.2,3868.11
NetB10_2: B10.2 D10.1 | length 475.5
  Bottom Layer w10: -4348.09,3954.72 -4370.24,3954.72 -4289.44,3954.72 B10.2@-4274.87,3969.29 ; B10.2@-4324.87,4269.29 -4296.92,4241.34 B10.2@-4296.92,3991.34 ; B10.2@-4296.92,3991.34 B10.2@-4274.87,3969.29 ; B10.2@-4296.92,3991.34 B10.2@-4274.87,3969.29
NetB10_3: B10.3 R16.2 | length 552.7
  Bottom Layer w10: B10.3@-4234.87,4369.29 -4234.87,4252.99 -4275.26,4212.6 -4275.26,4104.33 -4193.81,4022.87 B10.3@-4193.81,3969.29 -4196.36,3966.74 R16.2@-4196.36,3868.11
NetB11_2: B11.2 D11.1 | length 475.5
  Bottom Layer w10: -3598.25,3954.72 -3620.41,3954.72 -3539.6,3954.72 B11.2@-3525.03,3969.29 ; B11.2@-3575.03,4269.29 -3547.08,4241.34 B11.2@-3547.08,3991.34 ; B11.2@-3547.08,3991.34 B11.2@-3525.03,3969.29 ; B11.2@-3547.08,3991.34 B11.2@-3525.03,3969.29
NetB11_3: B11.3 R17.2 | length 552.7
  Bottom Layer w10: B11.3@-3485.03,4369.29 -3485.03,4252.99 -3525.43,4212.6 -3525.43,4104.33 -3443.97,4022.87 B11.3@-3443.97,3969.29 -3446.52,3966.74 R17.2@-3446.52,3868.11
NetB12_2: B12.2 D12.1 | length 422.1
  Bottom Layer w10: D12.1@-2870.57,3954.72 -2789.77,3954.72 B12.2@-2775.2,3969.29 -2797.25,3991.34 -2797.25,4241.34 B12.2@-2825.2,4269.29
NetB12_3: B12.3 R18.2 | length 556.4
  Bottom Layer w10: B12.3@-2735.2,4369.29 -2735.2,4252.99 -2780,4208.19 -2780,4108.74 -2694.14,4022.87 B12.3@-2694.14,3969.29 -2696.69,3966.74 R18.2@-2696.69,3868.11
NetB13_2: B13.2 B86.2 D13.1 | length 1334.9
  Top Layer w15.75: B13.2@-1649.21,3969.29 -1649.21,3863.21 -1629,3843 -1312,3843 -1275.53,3879.47 B86.2@-1275.53,3969.29 -1284,3977.76 -1284,4227.76 B86.2@-1325.53,4269.29
  Bottom Layer w10: B13.2@-1699.21,4269.29 -1671.26,4241.34 -1671.26,3991.34 B13.2@-1649.21,3969.29
  Bottom Layer w15.75: D13.1@-1746.06,3960.63 -1657.87,3960.63 B13.2@-1649.21,3969.29
NetB13_3: B13.3 R19.2 | length 573.2
  Bottom Layer w10: B13.3@-1609.21,4369.29 -1609.21,4252.99 -1649.61,4212.6 -1649.61,4104.33 -1568.15,4022.87 B13.3@-1568.15,3969.29
  Bottom Layer w15.75: R19.2@-1568.15,3859.4 B13.3@-1568.15,3969.29 ; R19.2@-1560.23,3867.32 R19.2@-1551.18,3858.27
NetB14_2: B14.2 D14.1 | length 413.8
  Bottom Layer w10: B14.2@-386.22,4269.29 -358.27,4241.34 -358.27,3991.34 B14.2@-336.22,3969.29
  Bottom Layer w15.75: D14.1@-423.23,3954.72 -408.66,3969.29 B14.2@-336.22,3969.29
NetB14_3: B14.3 R20.2 | length 551.1
  Bottom Layer w10: B14.3@-296.22,4369.29 -296.22,4252.99 -336.61,4212.6 -336.61,4104.33 -255.16,4022.87 B14.3@-255.16,3969.29
  Bottom Layer w15.75: B14.3@-255.16,3969.29 -242.13,3956.26 R20.2@-242.13,3874.02
NetB15_2: B15.2 D15.1 | length 409.8
  Bottom Layer w10: B15.2@550.79,4269.29 578.74,4241.34 578.74,3991.34 B15.2@600.79,3969.29
  Bottom Layer w15.75: D15.1@517.72,3954.72 532.28,3969.29 B15.2@600.79,3969.29
NetB15_3: B15.3 R21.2 | length 573.3
  Bottom Layer w10: B15.3@640.79,4369.29 640.79,4252.99 600.39,4212.6 600.39,4104.33 681.85,4022.87 B15.3@681.85,3969.29
  Bottom Layer w15.75: B15.3@681.85,3969.29 700.79,3950.35 R21.2@700.79,3854.33
NetB16_2: B16.2 D16.1 | length 429.5
  Bottom Layer w10: B16.2@1300.79,4269.29 1328.74,4241.34 1328.74,3991.34 B16.2@1350.79,3969.29
  Bottom Layer w15.75: D16.1@1248.03,3954.72 1262.6,3969.29 B16.2@1350.79,3969.29
NetB16_3: B16.3 R23.2 | length 554.1
  Bottom Layer w10: B16.3@1390.79,4369.29 1390.79,4252.99 1350.39,4212.6 1350.39,4104.33 1431.85,4022.87 B16.3@1431.85,3969.29
  Bottom Layer w15.75: R23.2@1421.26,3870.08 1421.26,3958.7 B16.3@1431.85,3969.29
NetB17_2: B17.2 D17.1 | length 475.5
  Bottom Layer w10: D17.1@-10722.43,3204.72 -10744.59,3204.72 -10663.78,3204.72 B17.2@-10649.21,3219.29 ; B17.2@-10699.21,3519.29 -10671.26,3491.34 B17.2@-10671.26,3241.34 ; B17.2@-10671.26,3241.34 B17.2@-10649.21,3219.29 ; B17.2@-10671.26,3241.34 B17.2@-10649.21,3219.29
NetB17_3: B17.3 R24.2 | length 552.7
  Bottom Layer w10: B17.3@-10609.21,3619.29 -10609.21,3502.99 -10649.61,3462.6 -10649.61,3354.33 -10568.15,3272.87 B17.3@-10568.15,3219.29 -10570.7,3216.74 R24.2@-10570.7,3118.11
NetB18_2: B18.2 D18.1 | length 475.5
  Bottom Layer w10: D18.1@-9972.45,3204.72 -9994.6,3204.72 -9913.8,3204.72 B18.2@-9899.23,3219.29 ; B18.2@-9949.23,3519.29 -9921.28,3491.34 B18.2@-9921.28,3241.34 ; B18.2@-9921.28,3241.34 B18.2@-9899.23,3219.29 ; B18.2@-9921.28,3241.34 B18.2@-9899.23,3219.29
NetB18_3: B18.3 R25.2 | length 552.7
  Bottom Layer w10: B18.3@-9859.23,3619.29 -9859.23,3502.99 -9899.62,3462.6 -9899.62,3354.33 -9818.17,3272.87 B18.3@-9818.17,3219.29 -9820.72,3216.74 R25.2@-9820.72,3118.11
NetB19_2: B19.2 D19.1 | length 475.5
  Bottom Layer w10: D19.1@-9222.46,3204.72 -9244.62,3204.72 -9163.81,3204.72 B19.2@-9149.25,3219.29 ; B19.2@-9199.25,3519.29 -9171.29,3491.34 B19.2@-9171.29,3241.34 ; B19.2@-9171.29,3241.34 B19.2@-9149.25,3219.29 ; B19.2@-9171.29,3241.34 B19.2@-9149.25,3219.29
NetB19_3: B19.3 R26.2 | length 552.7
  Bottom Layer w10: B19.3@-9109.25,3619.29 -9109.25,3502.99 -9149.64,3462.6 -9149.64,3354.33 -9068.18,3272.87 B19.3@-9068.18,3219.29 -9070.73,3216.74 R26.2@-9070.73,3118.11
NetB20_2: B20.2 D20.1 | length 475.5
  Bottom Layer w10: D20.1@-8472.48,3204.72 -8494.64,3204.72 -8413.83,3204.72 B20.2@-8399.26,3219.29 ; B20.2@-8449.26,3519.29 -8421.31,3491.34 B20.2@-8421.31,3241.34 ; B20.2@-8421.31,3241.34 B20.2@-8399.26,3219.29 ; B20.2@-8421.31,3241.34 B20.2@-8399.26,3219.29
NetB20_3: B20.3 R27.2 | length 552.7
  Bottom Layer w10: B20.3@-8359.26,3619.29 -8359.26,3502.99 -8399.66,3462.6 -8399.66,3354.33 -8318.2,3272.87 B20.3@-8318.2,3219.29 -8320.75,3216.74 R27.2@-8320.75,3118.11
NetB21_2: B21.2 D21.1 | length 475.5
  Bottom Layer w10: D21.1@-7722.5,3204.72 -7744.65,3204.72 -7663.85,3204.72 B21.2@-7649.28,3219.29 ; B21.2@-7699.28,3519.29 -7671.33,3491.34 B21.2@-7671.33,3241.34 ; B21.2@-7671.33,3241.34 B21.2@-7649.28,3219.29 ; B21.2@-7671.33,3241.34 B21.2@-7649.28,3219.29
NetB21_3: B21.3 R28.2 | length 552.7
  Bottom Layer w10: B21.3@-7609.28,3619.29 -7609.28,3502.99 -7649.67,3462.6 -7649.67,3354.33 -7568.22,3272.87 B21.3@-7568.22,3219.29 -7570.77,3216.74 R28.2@-7570.77,3118.11
NetB22_2: B22.2 D22.1 | length 475.5
  Bottom Layer w10: D22.1@-6972.51,3204.72 -6994.67,3204.72 -6913.86,3204.72 B22.2@-6899.29,3219.29 ; B22.2@-6949.29,3519.29 -6921.34,3491.34 B22.2@-6921.34,3241.34 ; B22.2@-6921.34,3241.34 B22.2@-6899.29,3219.29 ; B22.2@-6921.34,3241.34 B22.2@-6899.29,3219.29
NetB22_3: B22.3 R29.2 | length 552.7
  Bottom Layer w10: B22.3@-6859.29,3619.29 -6859.29,3502.99 -6899.69,3462.6 -6899.69,3354.33 -6818.23,3272.87 B22.3@-6818.23,3219.29 -6820.78,3216.74 R29.2@-6820.78,3118.11
NetB23_2: B23.2 D23.1 | length 475.5
  Bottom Layer w10: D23.1@-6222.53,3204.72 -6244.68,3204.72 -6163.88,3204.72 B23.2@-6149.31,3219.29 ; B23.2@-6199.31,3519.29 -6171.36,3491.34 B23.2@-6171.36,3241.34 ; B23.2@-6171.36,3241.34 B23.2@-6149.31,3219.29 ; B23.2@-6171.36,3241.34 B23.2@-6149.31,3219.29
NetB23_3: B23.3 R30.2 | length 552.7
  Bottom Layer w10: B23.3@-6109.31,3619.29 -6109.31,3502.99 -6149.7,3462.6 -6149.7,3354.33 -6068.25,3272.87 B23.3@-6068.25,3219.29 -6070.8,3216.74 R30.2@-6070.8,3118.11
NetB24_2: B24.2 D24.1 | length 475.5
  Bottom Layer w10: D24.1@-5472.55,3204.72 -5494.7,3204.72 -5413.89,3204.72 B24.2@-5399.33,3219.29 ; B24.2@-5449.33,3519.29 -5421.37,3491.34 B24.2@-5421.37,3241.34 ; B24.2@-5421.37,3241.34 B24.2@-5399.33,3219.29 ; B24.2@-5421.37,3241.34 B24.2@-5399.33,3219.29
NetB24_3: B24.3 R31.2 | length 552.7
  Bottom Layer w10: B24.3@-5359.33,3619.29 -5359.33,3502.99 -5399.72,3462.6 -5399.72,3354.33 -5318.26,3272.87 B24.3@-5318.26,3219.29 -5320.82,3216.74 R31.2@-5320.82,3118.11
NetB25_2: B25.2 D25.1 | length 475.5
  Bottom Layer w10: D25.1@-4722.56,3204.72 -4744.72,3204.72 -4663.91,3204.72 B25.2@-4649.34,3219.29 ; B25.2@-4699.34,3519.29 -4671.39,3491.34 B25.2@-4671.39,3241.34 ; B25.2@-4671.39,3241.34 B25.2@-4649.34,3219.29 ; B25.2@-4671.39,3241.34 B25.2@-4649.34,3219.29
NetB25_3: B25.3 R32.2 | length 552.7
  Bottom Layer w10: B25.3@-4609.34,3619.29 -4609.34,3502.99 -4649.74,3462.6 -4649.74,3354.33 -4568.28,3272.87 B25.3@-4568.28,3219.29 -4570.83,3216.74 R32.2@-4570.83,3118.11
NetB26_2: B26.2 D26.1 | length 475.5
  Bottom Layer w10: D26.1@-3972.58,3204.72 -3994.73,3204.72 -3913.93,3204.72 B26.2@-3899.36,3219.29 ; B26.2@-3949.36,3519.29 -3921.41,3491.34 B26.2@-3921.41,3241.34 ; B26.2@-3921.41,3241.34 B26.2@-3899.36,3219.29 ; B26.2@-3921.41,3241.34 B26.2@-3899.36,3219.29
NetB26_3: B26.3 R33.2 | length 552.7
  Bottom Layer w10: B26.3@-3859.36,3619.29 -3859.36,3502.99 -3899.75,3462.6 -3899.75,3354.33 -3818.3,3272.87 B26.3@-3818.3,3219.29 -3820.85,3216.74 R33.2@-3820.85,3118.11
NetB27_2: B27.2 D27.1 | length 475.5
  Bottom Layer w10: D27.1@-3222.6,3204.72 -3244.75,3204.72 -3163.94,3204.72 B27.2@-3149.38,3219.29 ; B27.2@-3199.38,3519.29 -3171.42,3491.34 B27.2@-3171.42,3241.34 ; B27.2@-3171.42,3241.34 B27.2@-3149.38,3219.29 ; B27.2@-3171.42,3241.34 B27.2@-3149.38,3219.29
NetB27_3: B27.3 R34.2 | length 552.7
  Bottom Layer w10: B27.3@-3109.38,3619.29 -3109.38,3502.99 -3149.77,3462.6 -3149.77,3354.33 -3068.31,3272.87 B27.3@-3068.31,3219.29 -3070.87,3216.74 R34.2@-3070.87,3118.11
NetB28_2: B28.2 D28.1 | length 475.5
  Bottom Layer w10: D28.1@-2472.61,3204.72 -2494.77,3204.72 -2413.96,3204.72 B28.2@-2399.39,3219.29 ; B28.2@-2449.39,3519.29 -2421.44,3491.34 B28.2@-2421.44,3241.34 ; B28.2@-2421.44,3241.34 B28.2@-2399.39,3219.29 ; B28.2@-2421.44,3241.34 B28.2@-2399.39,3219.29
NetB28_3: B28.3 R35.2 | length 552.7
  Bottom Layer w10: B28.3@-2359.39,3619.29 -2359.39,3502.99 -2399.79,3462.6 -2399.79,3354.33 -2318.33,3272.87 B28.3@-2318.33,3219.29 -2320.88,3216.74 R35.2@-2320.88,3118.11
NetB29_2: B29.2 D29.1 | length 418.4
  Bottom Layer w10: D29.1@-1558.98,3212.22 -1471.24,3212.22 B29.2@-1464.17,3219.29 -1486.22,3241.34 -1486.22,3491.34 B29.2@-1514.17,3519.29
NetB29_3: B29.3 R36.2 | length 539.8
  Bottom Layer w10: B29.3@-1424.17,3619.29 -1424.17,3502.99 -1464.57,3462.6 -1464.57,3354.33 -1383.11,3272.87 B29.3@-1383.11,3219.29 -1383.11,3136.57 R36.2@-1387.8,3131.89
NetB30_2: B30.2 D30.1 | length 412.9
  Bottom Layer w10: B30.2@-386.22,3519.29 -358.27,3491.34 -358.27,3241.34 B30.2@-336.22,3219.29
  Bottom Layer w15.75: D30.1@-425.47,3212.22 -418.4,3219.29 B30.2@-336.22,3219.29
NetB30_3: B30.3 R37.2 | length 538.2
  Bottom Layer w10: B30.3@-296.22,3619.29 -296.22,3502.99 -336.61,3462.6 -336.61,3354.33 -255.16,3272.87 -255.16,3253.94
  Bottom Layer w15.75: R37.2@-255.91,3131.89 -255.91,3253.19 -255.16,3253.94
NetB31_2: B31.2 D31.1 | length 404.7
  Bottom Layer w10: B31.2@550.79,3519.29 578.74,3491.34 578.74,3241.34 B31.2@600.79,3219.29
  Bottom Layer w15.75: D31.1@519.69,3212.22 526.76,3219.29 B31.2@600.79,3219.29
NetB31_3: B31.3 R38.2 | length 542.5
  Bottom Layer w10: B31.3@640.79,3619.29 640.79,3502.99 600.39,3462.6 600.39,3354.33 681.85,3272.87 B31.3@681.85,3219.29
  Bottom Layer w15.75: B31.3@681.85,3219.29 692.91,3208.23 R38.2@692.91,3131.89
NetB32_2: B32.2 D32.1 | length 416.6
  Bottom Layer w10: B32.2@1300.79,3519.29 1328.74,3491.34 1328.74,3241.34 B32.2@1350.79,3219.29
  Bottom Layer w15.75: D32.1@1257.87,3212.22 1264.94,3219.29 B32.2@1350.79,3219.29
NetB32_3: B32.3 R39.2 | length 540
  Bottom Layer w10: B32.3@1390.79,3619.29 1390.79,3502.99 1350.39,3462.6 1350.39,3354.33 1431.85,3272.87 B32.3@1431.85,3219.29 1437.01,3214.13 R39.2@1437.01,3131.89
NetB33_2: B33.2 D33.1 | length 422
  Bottom Layer w10: D33.1@-10558.31,2456.69 -10545.71,2469.29 B33.2@-10462.2,2469.29 -10484.25,2491.34 -10484.25,2741.34 B33.2@-10512.2,2769.29
NetB33_3: B33.3 R41.2 | length 540.2
  Bottom Layer w10: B33.3@-10422.2,2869.29 -10422.2,2752.99 -10462.6,2712.6 -10462.6,2604.33 -10381.14,2522.87 B33.3@-10381.14,2469.29 -10381.89,2468.54 R41.2@-10381.89,2379.92
NetB34_2: B34.2 D34.1 | length 422
  Bottom Layer w10: D34.1@-9807.91,2456.69 -9795.32,2469.29 B34.2@-9711.81,2469.29 -9733.86,2491.34 -9733.86,2741.34 B34.2@-9761.81,2769.29

## Text inside footprints (layer, text, board x,y; h text height)
B1: Bottom Overlay "+" at -10952.92,4009.84 h39.37; Bottom Overlay "+" at -10972.61,4324.8 h39.37 r180
B2: Bottom Overlay "+" at -10222.77,4324.8 h39.37 r180; Bottom Overlay "+" at -10203.08,4009.84 h39.37
B3: Bottom Overlay "+" at -9453.25,4009.84 h39.37; Bottom Overlay "+" at -9472.93,4324.8 h39.37 r180
B4: Bottom Overlay "+" at -8723.1,4324.8 h39.37 r180; Bottom Overlay "+" at -8703.41,4009.84 h39.37
B5: Bottom Overlay "+" at -7953.58,4009.84 h39.37; Bottom Overlay "+" at -7973.26,4324.8 h39.37 r180
B6: Bottom Overlay "+" at -7223.43,4324.8 h39.37 r180; Bottom Overlay "+" at -7203.74,4009.84 h39.37
B7: Bottom Overlay "+" at -6453.91,4009.84 h39.37; Bottom Overlay "+" at -6473.59,4324.8 h39.37 r180
B8: Bottom Overlay "+" at -5723.75,4324.8 h39.37 r180; Bottom Overlay "+" at -5704.07,4009.84 h39.37
B9: Bottom Overlay "+" at -4954.23,4009.84 h39.37; Bottom Overlay "+" at -4973.92,4324.8 h39.37 r180
B10: Bottom Overlay "+" at -4224.08,4324.8 h39.37 r180; Bottom Overlay "+" at -4204.4,4009.84 h39.37
B11: Bottom Overlay "+" at -3454.56,4009.84 h39.37; Bottom Overlay "+" at -3474.25,4324.8 h39.37 r180
B12: Bottom Overlay "+" at -2724.41,4324.8 h39.37 r180; Bottom Overlay "+" at -2704.73,4009.84 h39.37
B13: Bottom Overlay "+" at -1578.74,4009.84 h39.37; Bottom Overlay "+" at -1598.43,4324.8 h39.37 r180
B14: Bottom Overlay "+" at -285.43,4324.8 h39.37 r180; Bottom Overlay "+" at -265.75,4009.84 h39.37
B15: Bottom Overlay "+" at 671.26,4009.84 h39.37; Bottom Overlay "+" at 651.57,4324.8 h39.37 r180
B16: Bottom Overlay "+" at 1401.57,4324.8 h39.37 r180; Bottom Overlay "+" at 1421.26,4009.84 h39.37
B17: Bottom Overlay "+" at -10578.74,3259.84 h39.37; Bottom Overlay "+" at -10598.43,3574.8 h39.37 r180
B18: Bottom Overlay "+" at -9848.44,3574.8 h39.37 r180; Bottom Overlay "+" at -9828.76,3259.84 h39.37
B19: Bottom Overlay "+" at -9078.77,3259.84 h39.37; Bottom Overlay "+" at -9098.46,3574.8 h39.37 r180
B20: Bottom Overlay "+" at -8348.47,3574.8 h39.37 r180; Bottom Overlay "+" at -8328.79,3259.84 h39.37
B21: Bottom Overlay "+" at -7578.81,3259.84 h39.37; Bottom Overlay "+" at -7598.49,3574.8 h39.37 r180
B22: Bottom Overlay "+" at -6848.51,3574.8 h39.37 r180; Bottom Overlay "+" at -6828.82,3259.84 h39.37
B23: Bottom Overlay "+" at -6078.84,3259.84 h39.37; Bottom Overlay "+" at -6098.52,3574.8 h39.37 r180
B24: Bottom Overlay "+" at -5348.54,3574.8 h39.37 r180; Bottom Overlay "+" at -5328.85,3259.84 h39.37
B25: Bottom Overlay "+" at -4578.87,3259.84 h39.37; Bottom Overlay "+" at -4598.56,3574.8 h39.37 r180
B26: Bottom Overlay "+" at -3848.57,3574.8 h39.37 r180; Bottom Overlay "+" at -3828.89,3259.84 h39.37
B27: Bottom Overlay "+" at -3078.9,3259.84 h39.37; Bottom Overlay "+" at -3098.59,3574.8 h39.37 r180
B28: Bottom Overlay "+" at -2348.61,3574.8 h39.37 r180; Bottom Overlay "+" at -2328.92,3259.84 h39.37
B29: Bottom Overlay "+" at -1393.7,3259.84 h39.37; Bottom Overlay "+" at -1413.39,3574.8 h39.37 r180
B30: Bottom Overlay "+" at -285.43,3574.8 h39.37 r180; Bottom Overlay "+" at -265.75,3259.84 h39.37
B31: Bottom Overlay "+" at 671.26,3259.84 h39.37; Bottom Overlay "+" at 651.57,3574.8 h39.37 r180
B32: Bottom Overlay "+" at 1401.57,3574.8 h39.37 r180; Bottom Overlay "+" at 1421.26,3259.84 h39.37
B33: Bottom Overlay "+" at -10391.73,2509.84 h39.37; Bottom Overlay "+" at -10411.42,2824.8 h39.37 r180
B34: Bottom Overlay "+" at -9661.02,2824.8 h39.37 r180; Bottom Overlay "+" at -9641.34,2509.84 h39.37
B35: Bottom Overlay "+" at -8890.94,2509.84 h39.37; Bottom Overlay "+" at -8910.63,2824.8 h39.37 r180
B36: Bottom Overlay "+" at -8160.24,2824.8 h39.37 r180; Bottom Overlay "+" at -8140.55,2509.84 h39.37
B37: Bottom Overlay "+" at -7390.16,2509.84 h39.37; Bottom Overlay "+" at -7409.84,2824.8 h39.37 r180
B38: Bottom Overlay "+" at -6659.45,2824.8 h39.37 r180; Bottom Overlay "+" at -6639.76,2509.84 h39.37
B39: Bottom Overlay "+" at -5889.37,2509.84 h39.37; Bottom Overlay "+" at -5909.06,2824.8 h39.37 r180
B40: Bottom Overlay "+" at -5158.66,2824.8 h39.37 r180; Bottom Overlay "+" at -5138.98,2509.84 h39.37
B41: Bottom Overlay "+" at -4388.58,2509.84 h39.37; Bottom Overlay "+" at -4408.27,2824.8 h39.37 r180
B42: Bottom Overlay "+" at -3657.87,2824.8 h39.37 r180; Bottom Overlay "+" at -3638.19,2509.84 h39.37
B43: Bottom Overlay "+" at -2887.8,2509.84 h39.37; Bottom Overlay "+" at -2907.48,2824.8 h39.37 r180
B44: Bottom Overlay "+" at -1692.91,2824.8 h39.37 r180; Bottom Overlay "+" at -1673.23,2509.84 h39.37
B45: Bottom Overlay "+" at 671.26,2507.87 h39.37; Bottom Overlay "+" at 651.57,2822.83 h39.37 r180
B46: Bottom Overlay "+" at 1401.57,2822.83 h39.37 r180; Bottom Overlay "+" at 1421.26,2507.87 h39.37
B47: Bottom Overlay "+" at 2171.26,2507.87 h39.37; Bottom Overlay "+" at 2151.57,2822.83 h39.37 r180
B48: Bottom Overlay "+" at 2151.57,3574.8 h39.37 r180; Bottom Overlay "+" at 2171.26,3259.84 h39.37
B49: Bottom Overlay "+" at -10017.72,1759.84 h39.37; Bottom Overlay "+" at -10037.4,2074.8 h39.37 r180
B50: Bottom Overlay "+" at -9287.18,2074.8 h39.37 r180; Bottom Overlay "+" at -9267.5,1759.84 h39.37
B51: Bottom Overlay "+" at -8517.28,1759.84 h39.37; Bottom Overlay "+" at -8536.96,2074.8 h39.37 r180
B52: Bottom Overlay "+" at -7786.75,2074.8 h39.37 r180; Bottom Overlay "+" at -7767.06,1759.84 h39.37
B53: Bottom Overlay "+" at -7016.84,1759.84 h39.37; Bottom Overlay "+" at -7036.53,2074.8 h39.37 r180
B54: Bottom Overlay "+" at -6286.31,2074.8 h39.37 r180; Bottom Overlay "+" at -6266.62,1759.84 h39.37
B55: Bottom Overlay "+" at -5516.4,1759.84 h39.37; Bottom Overlay "+" at -5536.09,2074.8 h39.37 r180
B56: Bottom Overlay "+" at -4785.87,2074.8 h39.37 r180; Bottom Overlay "+" at -4766.19,1759.84 h39.37
B57: Bottom Overlay "+" at -4015.97,1759.84 h39.37; Bottom Overlay "+" at -4035.65,2074.8 h39.37 r180
B58: Bottom Overlay "+" at -3285.43,2074.8 h39.37 r180; Bottom Overlay "+" at -3265.75,1759.84 h39.37
B59: Bottom Overlay "+" at -2234.94,1756.35 h39.37; Bottom Overlay "+" at -2254.62,2071.31 h39.37 r180
B59A: Bottom Overlay "+" at -1858.85,1756.35 h39.37; Bottom Overlay "+" at -1878.53,2071.31 h39.37 r180
B60: Bottom Overlay "+" at -1222.44,2071.31 h39.37 r180; Bottom Overlay "+" at -1202.76,1756.35 h39.37
B61: Bottom Overlay "+" at -265.75,1570.87 h39.37; Bottom Overlay "+" at -285.43,1885.83 h39.37 r180
B62: Bottom Overlay "+" at 651.57,2074.8 h39.37 r180; Bottom Overlay "+" at 671.26,1759.84 h39.37
B63: Bottom Overlay "+" at 1421.26,1759.84 h39.37; Bottom Overlay "+" at 1401.57,2074.8 h39.37 r180
B64: Bottom Overlay "+" at 2151.57,2074.8 h39.37 r180; Bottom Overlay "+" at 2171.26,1759.84 h39.37
B65: Bottom Overlay "+" at -11610.24,1009.84 h39.37; Bottom Overlay "+" at -11629.92,1324.8 h39.37 r180
B66: Bottom Overlay "+" at -10793.31,1328.74 h39.37 r180; Bottom Overlay "+" at -10687.01,1013.78 h39.37
B67: Bottom Overlay "+" at -9923.23,1009.84 h39.37; Bottom Overlay "+" at -9942.91,1324.8 h39.37 r180
B68: Bottom Overlay "+" at -6848.43,1324.8 h39.37 r180; Bottom Overlay "+" at -6828.74,1009.84 h39.37
B69: Bottom Overlay "+" at -3734.25,1009.84 h39.37; Bottom Overlay "+" at -3753.94,1324.8 h39.37 r180
B70: Bottom Overlay "+" at -2905.51,1330.71 h39.37 r180; Bottom Overlay "+" at -2812.99,1013.78 h39.37
B71: Bottom Overlay "+" at -2047.24,1009.84 h39.37; Bottom Overlay "+" at -2066.93,1324.8 h39.37 r180